# Altium PCB VCO.PcbDoc (part 2 of 3)
Units mil, origin at the board's own origin, x right, y up, seen from the top; angles counter-clockwise.
Board outline 4000 x 2000 mil, 4 copper layers (Top Layer, Signal Layer 1, Signal Layer 2, Bottom Layer), stack 60.6 mil thick; 123 components, 70 nets, 383 pads, 321 vias.
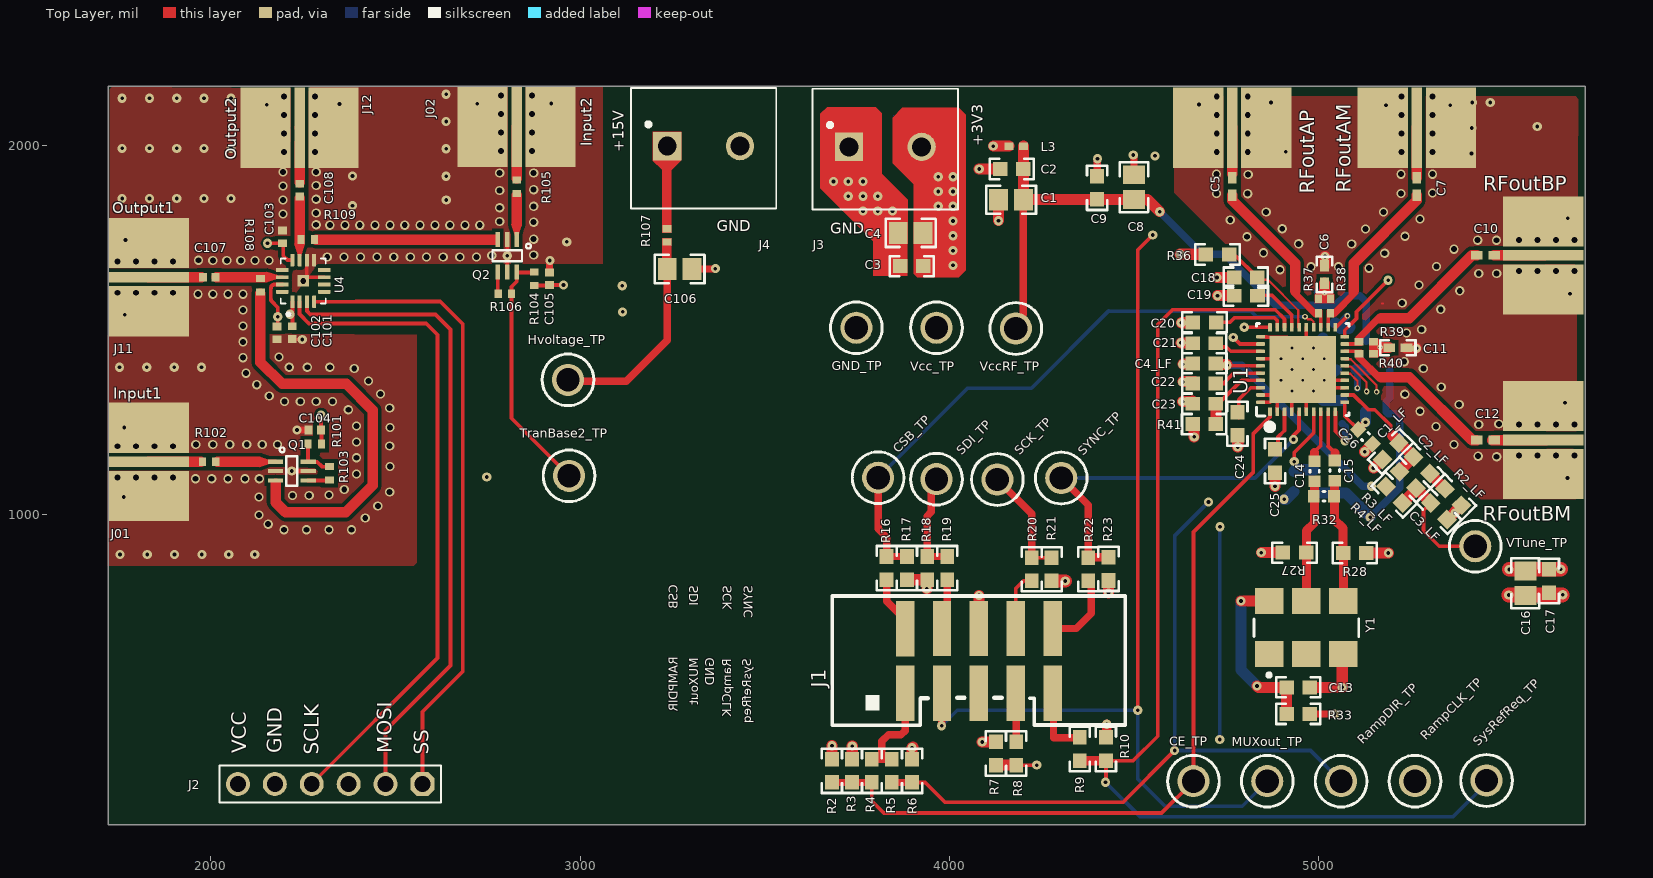
[diagram p0: Top Layer view]

## Via types
v1: diameter 25, hole 16, Top Layer to Bottom Layer, 152 vias
v2: diameter 25, hole 10, Top Layer to Bottom Layer, 148 vias
v3: diameter 19.68, hole 7.87, Top Layer to Bottom Layer, 12 vias
v4: diameter 15, hole 8, Top Layer to Bottom Layer, 7 vias
v5: diameter 25, hole 10, Top Layer to Bottom Layer, tented both sides, 1 vias
v6: diameter 24, hole 10, Top Layer to Bottom Layer, 1 vias

## Nets (pads, with @x,y where several pads share a name; then routed paths per layer and width w, separated by ;. In a path a pad name is that pad's centre, name@x,y a point inside that pad or via, vN(x,y) a via of type N, cw(c..) or ccw(c..) an arc to the next point about the centre after c; other vN are vias at no path point) (continued)
GND: (continued)
  other v1: 2198,960 2259,960 2320,960 2381,960 2155,975 2418,992 2130,1000 2452,1024 2130,1049 2221,1053 2266,1053 2320,1054 2484,1062 2361,1069 1958,1098 2002,1098 2046,1098 2092,1098 2131,1098 2394,1111 2485,1131 2394,1155 5482.4,1157.8 5432.3,1159.2 2484,1187 1959,1191 2005,1191 2051,1191 2097,1191 2139,1191 2180,1191 5366.5,1190.7 2394,1198 2485,1237 5317.9,1239.3 2394,1241 5433.8,1245.1 5488.1,1246.5 5275,1280.8 2372,1285 2484,1290 5380.8,1299.4 2199,1307 2242,1307 2285,1307 2329,1307 2158,1322 5233.52,1327.01 2459,1328 5332.2,1346.6 2124,1353 2427,1363 2095,1384 2388,1397 5283.6,1396.7 2212,1400 2261,1400 2322,1400 5232.1,1415.3 2087,1426 2184,1428 2087,1469 5237.8,1492.5 5279.2,1502.5 2087,1512 2087,1555 5330.8,1556.9 5226.3,1574.1 1965,1598 2005,1598 2046,1598 2087,1598 5382.3,1607 5272.1,1622.7 5433.8,1654.2 5482.4,1654.2 4895.2,1664.2 5136.2,1668.5 4979.6,1672.1 5054,1672.1 5319.3,1672.8 2005,1689 2043,1689 2081,1689 2119,1689 2157,1689 1966,1690 2315,1699 2360,1699 2405,1699 2450,1699 2495,1699 2540,1699 2584,1699 2629,1699 2674,1699 2719,1699 2760.5,1703.09 2874,1704 5178.9,1708.8 4850.8,1710 5366.5,1720 4946,1734.3 5089.5,1734.1 5430.9,1744.3 5481.7,1744 2874,1747 4806.4,1753.6 5234.2,1755 5126.9,1774.4 4901.6,1775.1 2322,1785 2363,1785 2403,1785 2444,1785 2485,1785 2525,1785 2566,1785 2607,1785 2647,1785 2688,1785 2728,1785 2285,1786 2874,1793 2782,1795 4760.7,1798.7 5274.3,1801.5 2195,1815 2285,1818 4858,1820.8 5175.6,1820.8 2782,1832 2874,1836 2195,1853 2285,1855 4807.89,1870.21 4723.5,1870.9 5223.5,1870.9 5308.6,1872.3 2782,1879 2874,1881 2195,1891 2285,1892 4809.3,1922.4 4723.5,1923.1 5223.5,1923.1 5308.6,1923.1 2782,1926 2874,1926 2195,1929 2285,1929
  other v2: 5661,784 1753.4,892.9 1827.4,892.9 1901.4,892.9 1975.4,892.9 2048.4,892.9 2118.4,892.9 5369.19,1005.34 1763.4,1048.9 5674,1100 5125,1171.2 1765.4,1236.9 5667.3,1304 4632,1360 1752.4,1399.9 1826.4,1399.9 1900.4,1399.9 1974.4,1399.9 1766.4,1541.9 5680.7,1599 2802.5,1702.09 2963.9,1739.6 1768.4,1744.9 5674.8,1804 3766.2,1823.4 3806.2,1823.4 2383.4,1837.9 2637,1853 1759.4,1856.9 1833.4,1856.9 1907.4,1856.9 1981.4,1856.9 2054.4,1856.9 3726.2,1863.4 3766.2,1863.4 3806.2,1863.4 3686.2,1903.4 3726.2,1903.4 3766.2,1903.4 2383.4,1917.9 2636.9,1917.6 4557,1972.6 5414,1979 4911.2,1983.8 2636.9,1991.6 1759.4,1992.9 1833.4,1992.9 1907.4,1992.9 1981.4,1992.9 2054.4,1992.9 5415,2048 5592.4,2051.9 2636.9,2065.6 5182.7,2110 5356.5,2110 2151,2111 4676.3,2112 2348,2113 2720.9,2113.6 2921.9,2114.6 4871,2117 5416,2117 5465,2117 1759.4,2128.9 1833.4,2128.9 1907.4,2128.9 1981.4,2128.9 2054.4,2128.9 2636.9,2139.6
  other v3: 4927.87,1335.73 4898.73,1364.87 4957,1364.87 4986.13,1394 4898.73,1423.13 4957,1423.13 5015.27,1423.13 4927.87,1452.27 4986.13,1452.27
  other v6: 5265,1451.2
MOSI: J2.2 U4.3 | length 1739.2
  Top Layer w10.5: U4.3@2259.84,1577.5 2259.84,1552.16 2269,1543 2608,1543 2649,1502 2649,592 2473,416 J2.2@2473,271
MUXOUT: J1.3 MUXout_TP.1 U1.20 | length 3448.9
  Top Layer w10: v2@3972,429 v2(3979,429) ; v2(4510,471) 4510,1717.55 v5(4550.65,1758.2) ; U1.20@5071.17,1482.58 5071.17,1500.3 5102.9,1532.03 5102.9,1550.6 v2(5188.3,1636)
  Top Layer w20: v2(3979,429) 3979,516.5 J1.3@3980,517.5
  Signal Layer 2 w10: v5(4550.65,1758.2) 4729.7,1758.2 4869.4,1618.5 4918.7,1618.5 4936.2,1636 v2(5188.3,1636)
  Bottom Layer w10: v2(3979,429) 4021,471 v2(4510,471) 4510,285 4514.09,280.91 4584,211 4793,211 MUXout_TP.1@4861,279